# EAGLE board M_B_block_base-rotated (EAGLE 9.6.2)
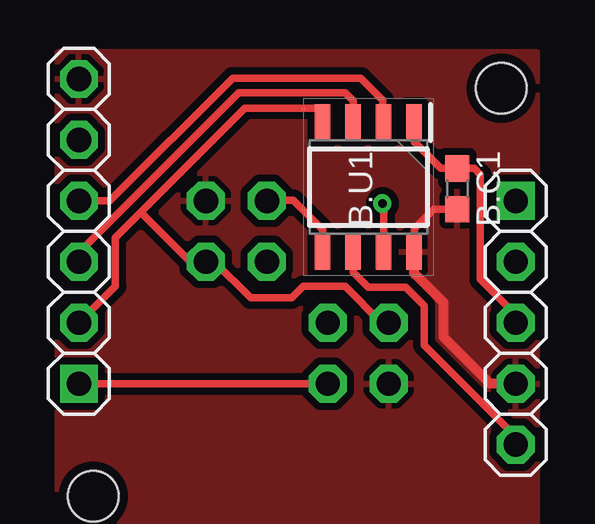
[diagram p0: board, top side]
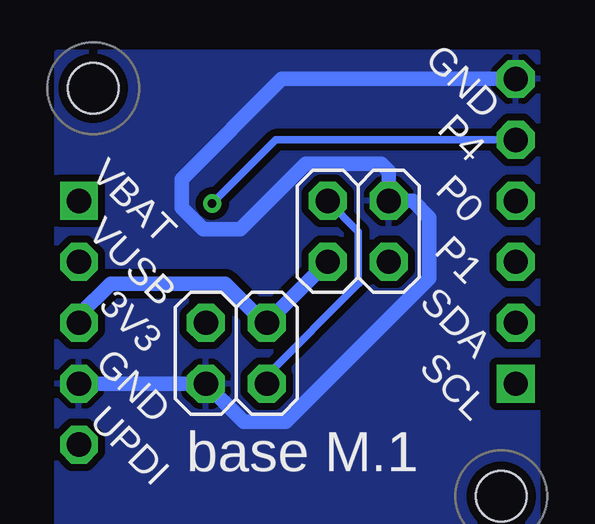
[diagram p1: board, bottom side, seen from below]

No outline drawn. Coordinates in mm, seen from the top.
Copper layers (1*16): Top 0.035mm / dielectric 1.5mm / Bottom 0.035mm
Design rules "default *": minimum track width 10mil, minimum drill 0.35mm, track to track 12mil, track to pad 12mil, pad to pad 12mil, via to via 12mil, smd to smd 12mil, copper to edge 15mil, drill to drill 40mil, minimum pad ring 10mil, minimum via ring 8mil, stop-mask expansion 4mil, vias tented up to drill 0mil, thermal gap 10mil
Holes 2.1 mm at 2,2 19,19

## Footprints (pad centres in the part's own frame; a part is rotated, then mirrored left to right if it is on the bottom)
C0603 = smd 1.1 x 1: 1 -0.85,0; 2 0.85,0
1X06 = drill 1.016 pad 1.575 square: 1 -6.35,0 | drill 1.016 pad 1.575 octagon: 2 -3.81,0; 3 -1.27,0; 4 1.27,0; 5 3.81,0; 6 6.35,0
2X02 = drill 1.016 pad 1.575 octagon: 1 -1.27,-1.27; 2 -1.27,1.27; 3 1.27,-1.27; 4 1.27,1.27
1X05 = drill 1.016 pad 1.575 square: 1 -5.08,0 | drill 1.016 pad 1.575 octagon: 2 -2.54,0; 3 0,0; 4 2.54,0; 5 5.08,0
SOIC127P600X175-8N = smd 1.5 x 0.65: 1 -2.7,1.905; 2 -2.7,0.635; 3 -2.7,-0.635; 4 -2.7,-1.905; 5 2.7,-1.905; 6 2.7,-0.635; 7 2.7,0.635; 8 2.7,1.905

## Placement (x,y rotation side)
B.C1  100n  [C0603]  17.17,14.81 270 top
B.J2  [1X06]  1.4,13.04 90 top
B.J4  [2X02]  7.96,13.04 180 bottom
B.J5  [1X05]  19.6,9.23 270 top
B.U1  AT412  [SOIC127P600X175-8N]  13.46,14.88 270 top
JB3  [2X02]  13.04,7.96 180 bottom

## Library data of the parts
B.C1 = rcl; SPICEPREFIX: C
B.J2 B.J4 B.J5 JB3 = pinhead2
B.U1 = ATTINY412-SSN; DESCRIPTION: 8-bit Microcontrollers - MCU 20MHz, 4KB, SOIC8, Ind 105C, Green, Tube; HEIGHT: 1.75mm; MANUFACTURER_NAME: Microchip; MANUFACTURER_PART_NUMBER: ATTINY412-SSN; MOUSER_PART_NUMBER: 579-ATTINY412-SSN; MOUSER_PRICE-STOCK: https://www.mouser.co.uk/ProductDetail/Microchip-Technology/ATTINY412-SSN?qs=3HJ2avRr9PItQG9ZsCamPQ%3D%3D

## Nets
3V3: B.C1.1 B.J4.4 B.J5.3 B.U1.1 JB3.1
GND: B.C1.2 B.J2.6 B.J4.1 B.J5.4 B.U1.8 JB3.4
PA3: B.J2.5 B.U1.7
PA6: B.J2.4 B.U1.2
PA7: B.J2.3 B.U1.3
SCL: B.J2.1 B.J4.3 B.U1.5 JB3.2
SDA: B.J2.2 B.J4.2 B.U1.4 JB3.3
UPDI: B.J5.5 B.U1.6

## Tracks (layer width: path | path; a pad name or v marks a point on that pad's centre or on a via)
3V3
  Top 0.305: B.U1.1 15.37,16.77 16.48,15.66 B.C1.1 17.87,15.66 18.13,15.4 18.13,11.03 19.6,9.56 B.J5.3
  Bottom 0.61: B.J5.3 19.6,9.54 18.28,10.86 13.5,10.86 11.87,9.23 JB3.1 B.J4.4
GND
  Top 0.305: 17.01,14.12 B.C1.2 16.18,13.96 15.37,13.14 B.U1.8
  Top 0.406: B.J5.4 18.53,6.69 16.6,8.63 16.6,10.07 15.37,11.29 B.U1.8
  Top 0.61: B.U1.8 15.42,12.18 15.37,12.13 | B.C1.2 17.09,13.96 17.07,13.98
  Bottom 0.61: B.J5.4 JB3.4 12.72,5.11 10.97,5.11 5,11.07 5,13.61 5.7,14.31 B.J4.1 6.69,15.55 7,15.86 10.15,15.86 12.88,13.13 14.43,13.13 15.32,14.02 15.32,15.21 11.14,19.39 B.J2.6
  pour Bottom (isolate 0.305): 0.5,20.5 0.5,0.5 20.5,0.5 20.5,20.5
  pour Top (isolate 0.305): 0.5,20.5 0.5,0.5 20.5,0.5 20.5,20.5
PA3  (via drill 0.35)
  Top 0.305: v14.05,14.2 14.1,14.15 B.U1.7
  Bottom 0.305: B.J2.5 11.39,16.85 v14.05,14.2
PA6
  Top 0.305: B.U1.2 14.07,17.61 14.07,18.51 13.15,19.42 7.81,19.42 2.69,14.31 B.J2.4
PA7
  Top 0.305: B.U1.3 12.82,18.48 12.49,18.81 8.06,18.81 1.4,12.15 B.J2.3
SCL
  Top 0.305: B.U1.5 11.56,13.11 10.34,14.33 9.25,14.33 B.J4.3 | B.J2.1 JB3.2
  Bottom 0.305: B.J4.3 7.95,13.03 7.95,10.85 | JB3.2 11.77,7.03 7.95,10.85 | 7.95,10.85 7.92,10.87
SDA
  Top 0.305: B.U1.4 11.56,17.93 11.33,18.16 8.31,18.16 3.97,13.83 | JB3.3 14.01,9.23 12.49,10.74 10.74,10.74 10.26,10.26 8.55,10.26 7.05,11.77 B.J4.2 6.03,11.77 3.97,13.83 | B.J2.2 2.92,10.75 2.92,12.78 3.97,13.83
UPDI
  Top 0.305: B.J5.5 19.6,4.48 15.78,8.3 15.78,9.94 15.02,10.7 13.46,10.7 12.83,11.33 B.U1.6

## Text on the board
bPlace: GND | P4 | P0 | VBAT | P1 | VUSB | SDA | 3V3 | SCL | GND | base M.1 | UPDI